# EAGLE board ble112 (EAGLE 7.3.0)
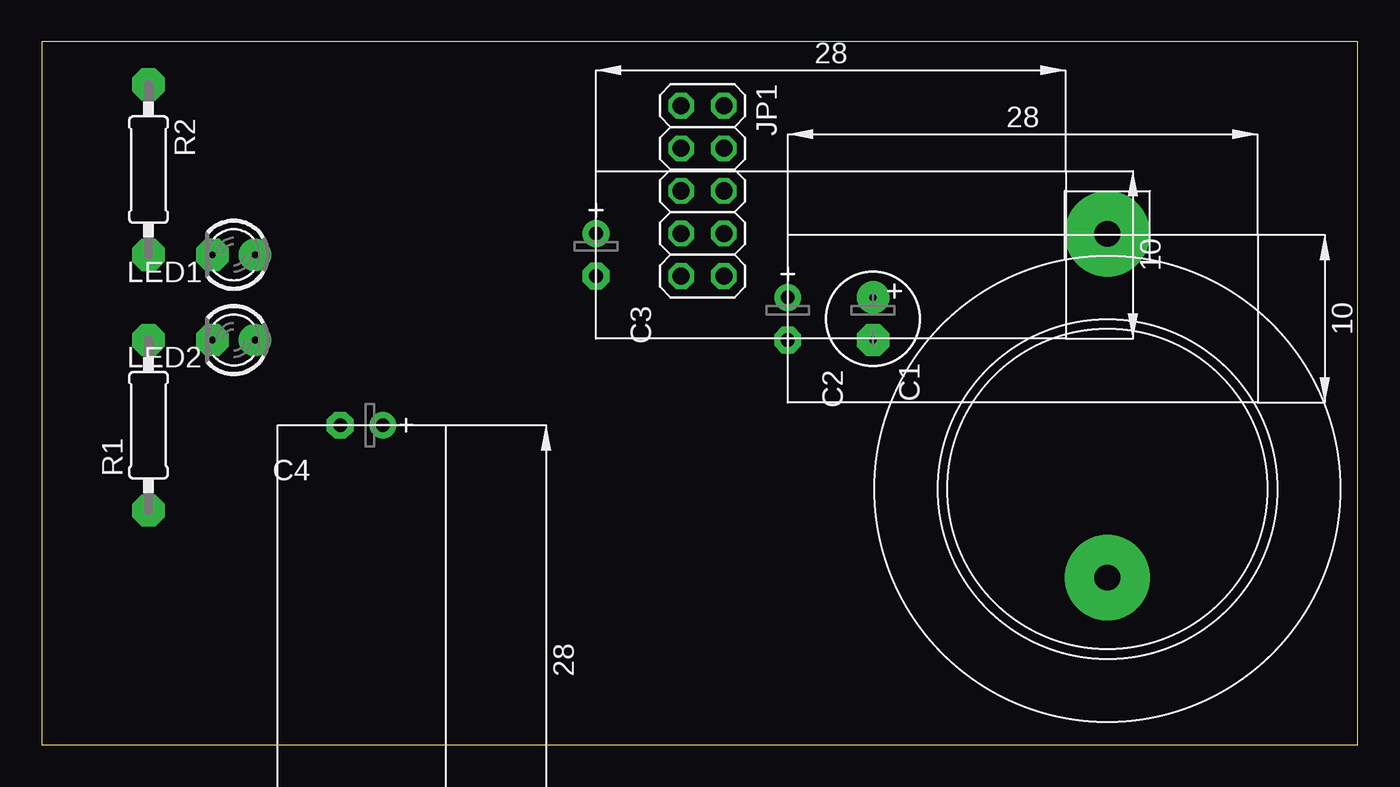
[diagram p0: board, top side]
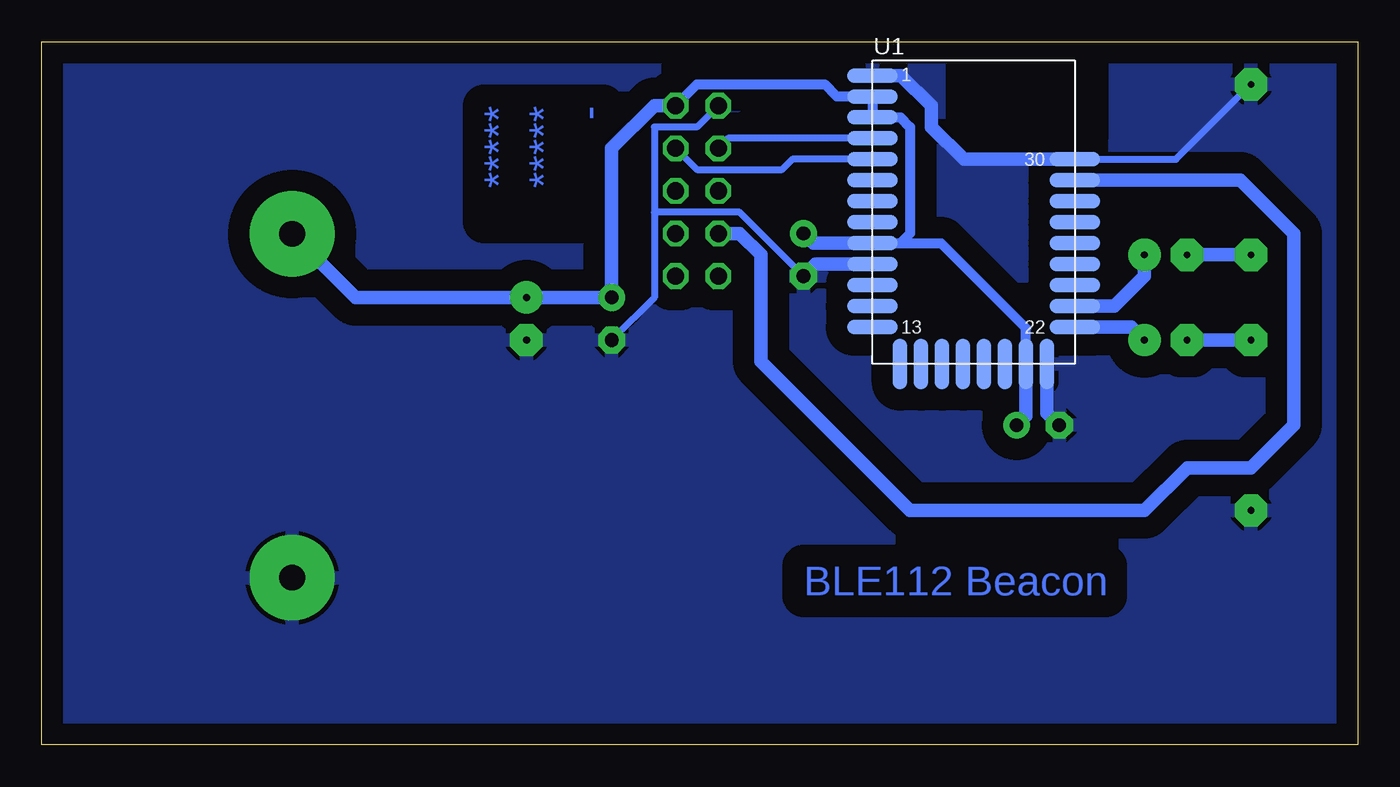
[diagram p1: board, bottom side, seen from below]

Size 78.41 x 41.9 mm. Coordinates in mm from the lower left corner, seen from the top.
Outline: 0,0 78.41,0 78.41,41.9 0,41.9 0,0
Copper layers (1*16): Top 0.035mm / dielectric 1.5mm / Bottom 0.035mm
Design rules "default": minimum track width 10mil, minimum drill 24mil, track to track 8mil, track to pad 8mil, pad to pad 8mil, via to via 8mil, smd to smd 8mil, copper to edge 40mil, drill to drill 8mil, minimum pad ring 10mil, minimum via ring 8mil, stop-mask expansion 4mil, vias tented up to drill 0mil, thermal gap 10mil
bRestrict: area 16.5,36.3 to 22.9,40.6

## Footprints (pad centres in the part's own frame; a part is rotated, then mirrored left to right if it is on the bottom)
E2,5-6 = drill 0.406 pad 1.93: + -1.27,0 | drill 0.406 pad 1.93 octagon: - 1.27,0
E2,5-7 = drill 0.813 pad 1.6: + -1.27,0 | drill 0.813 pad 1.6 octagon: - 1.27,0
2X05 = drill 1.016 octagon: 1 -5.08,-1.27; 2 -5.08,1.27; 3 -2.54,-1.27; 4 -2.54,1.27; 5 0,-1.27; 6 0,1.27; 7 2.54,-1.27; 8 2.54,1.27; 9 5.08,-1.27; 10 5.08,1.27
LED3MM = drill 0.406 pad 1.93: A -1.27,0 | drill 0.406 pad 1.93 octagon: K 1.27,0
0207/10 = drill 0.406 pad 1.93 octagon: 1 -5.08,0; 2 5.08,0
SF-BLUEGIGA_BLE112-A = smd 3 x 0.85: AVDD1 -6.05,6.9; AVDD2 -6.05,5.65; GND1 -6.05,8.15; GND2 -6.05,-3.1; GND4 6,3.15; P0_0 6,0.65; P0_1 6,-0.6; P0_2 6,-1.85; P0_3 6,-3.1; P0_4 6,-4.35; P0_5 6,-5.6; P0_6 6,-6.85; P1_5 -6.05,-6.85; P1_6 -6.05,-0.6; P1_7 -6.05,0.65; P2_0 -6.05,1.9; P2_1 -6.05,3.15; P2_2 -6.05,4.4; RESET 6,1.9; USB+ -6.05,-4.35; USB- -6.05,-5.6; VDD_USB -6.05,-1.85 | smd 0.85 x 3: DVDD 3.1,-9.05; GND3 4.35,-9.05; P0_7 1.85,-9.05; P1_0 0.6,-9.05; P1_1 -0.65,-9.05; P1_2 -1.9,-9.05; P1_3 -3.15,-9.05; P1_4 -4.4,-9.05
CELL_HOLDER_PACKAGE = drill 1.524 pad 5.08: VDD -5.283,0; VPP 15.215,0

## Placement (x,y rotation side)
C1  100uF  [E2,5-6]  49.53,25.4 270 top
C2  1uF  [E2,5-7]  44.45,25.4 270 top
C3  1uF  [E2,5-7]  33.02,29.21 270 top
C4  1uF  [E2,5-7]  19.05,19.05 180 top
JP1  [2X05]  39.37,33.02 270 top
LED1  LED_3MM  [LED3MM]  11.43,29.21 180 top
LED2  LED_3MM  [LED3MM]  11.43,24.13 180 top
R1  1000  [0207/10]  6.35,19.05 90 top
R2  1000  [0207/10]  6.35,34.29 270 top
U1  SF-BLUEGIGA_BLE112-A-VISUAL  [SF-BLUEGIGA_BLE112-A]  22.86,31.75 0 bottom
U$1  KEYSTON_106  [CELL_HOLDER_PACKAGE]  63.5,15.24 90 top

## Library data of the parts
C1-C4 LED1 LED2 R1 R2 = @Club_passif
JP1 = pinhead
U1 = ble112
U$1 = keystone_106

## Nets
3V: C1.+ C2.+ C3.+ C4.+ JP1.2 U1.AVDD1 U1.AVDD2 U1.DVDD U1.VDD_USB U$1.VPP
GND: C1.- C2.- C3.- C4.- JP1.1 R1.1 R2.1 U1.GND1 U1.GND2 U1.GND3 U1.GND4 U$1.VDD
N$4: JP1.5
N$5: LED2.K R1.2
N$6: JP1.9
N$7: LED1.K R2.2
N$9: JP1.6
N$10: JP1.8
N$11: JP1.10
P0_5: LED1.A U1.P0_5
P0_6: LED2.A U1.P0_6
P2_1: JP1.4 U1.P2_1
P2_2: JP1.3 U1.P2_2
RESET_N: JP1.7 U1.RESET

## Tracks (layer width: path | path; a pad name or v marks a point on that pad's centre or on a via)
3V
  Bottom 0.61: JP1.2 39.37,39.37 31.75,39.37 31.03,38.65 U1.AVDD1 U1.AVDD2 27.24,37.4 26.67,36.83 26.67,30.48 27.25,29.9 | U1.VDD_USB 27.25,29.9 | 27.25,29.9 24.82,29.9 19.76,24.84 U1.DVDD
  Bottom 0.813: U1.DVDD 19.76,19.61 C4.+ | U1.VDD_USB 32.44,29.9 C3.+ | JP1.2 41.91,38.1 44.45,35.56 C2.+ C1.+ 59.71,26.67 U$1.VPP
GND
  Bottom 0.406: JP1.1 39.37,36.83 41.91,36.83 41.91,31.75 | 41.91,31.75 41.91,26.67 C2.- | C3.- 36.83,31.75 41.91,31.75 | U1.GND4 10.82,34.9 R2.1
  Bottom 0.813: U1.GND3 18.51,19.78 C4.- | U1.GND2 32.31,28.65 C3.- | U1.GND1 27.2,39.9 25.4,38.1 25.4,36.83 23.47,34.9 U1.GND4
  pour Bottom (isolate 1.27): 1.27,40.64 78.74,40.64 78.74,0 1.27,0
N$5
  Bottom 0.813: LED2.K R1.2
N$7
  Bottom 0.813: LED1.K R2.2
P0_5
  Bottom 0.813: U1.P0_5 14.49,26.15 12.7,27.94 LED1.A
P0_6
  Bottom 0.813: U1.P0_6 13.47,24.9 LED2.A
P2_1
  Bottom 0.406: JP1.4 39.37,34.29 34.29,34.29 33.68,34.9 U1.P2_1
P2_2
  Bottom 0.406: U1.P2_2 37.51,36.15 JP1.3
RESET_N
  Bottom 0.813: JP1.7 36.83,30.48 35.56,29.21 35.56,22.86 26.67,13.97 12.7,13.97 10.16,16.51 6.35,16.51 3.81,19.05 3.81,30.48 6.98,33.65 U1.RESET

## Text on the board
Bottom: ***** / ***** / - | BLE112 Beacon